# Altium PCB PCB_V3.PcbDoc
Units mm, origin at the board's own origin, x right, y up, seen from the top; angles counter-clockwise.
Board outline 25.27 x 84.33 mm, 2 copper layers (Top Layer, Bottom Layer); 41 components, 24 nets, 113 pads, 17 vias.
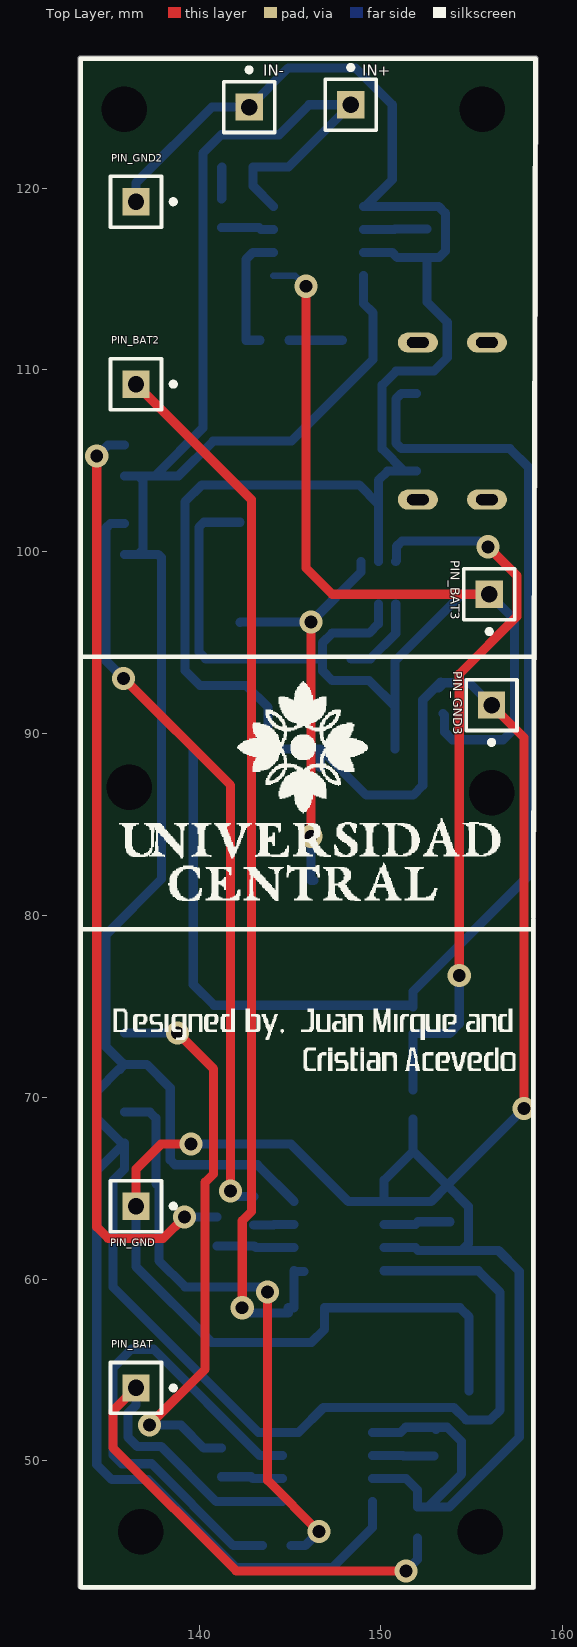
[diagram p0: Top Layer view]
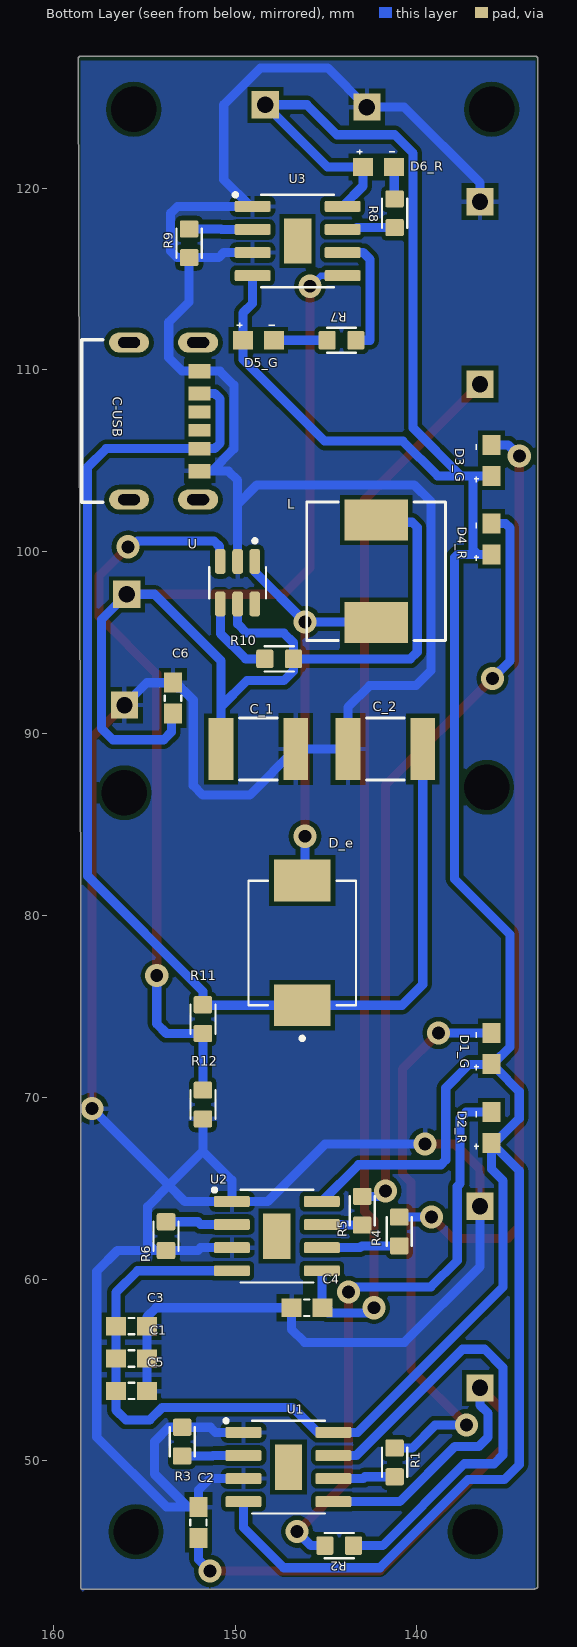
[diagram p1: Bottom Layer view, seen from below]
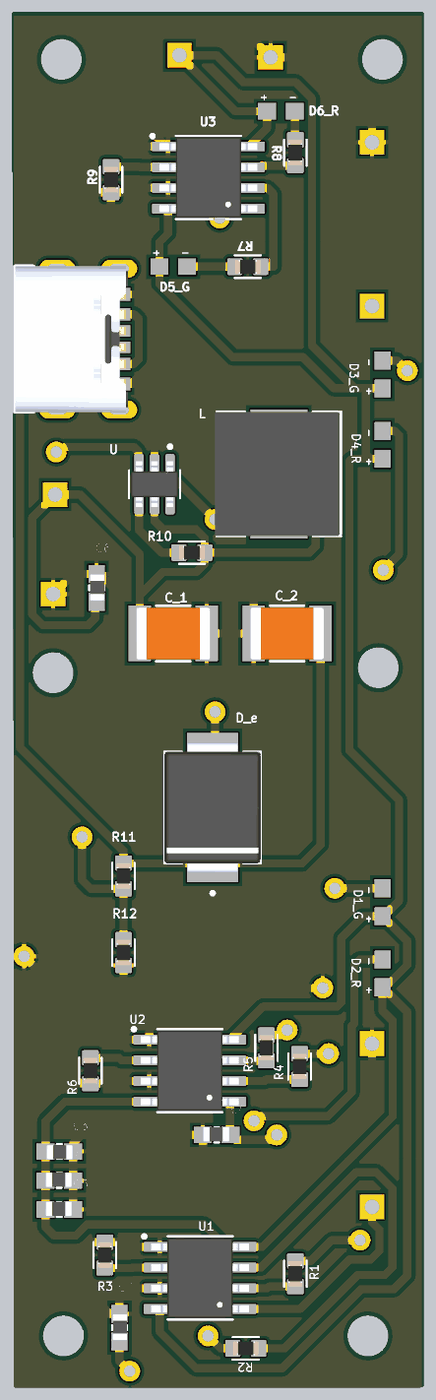
[diagram p2: 3D render of the assembled board from below, using the file's embedded part models]

## Layer stack, top to bottom
Top Solder: solder mask 0.0102, Solder Resist, Dk 3.5
Top Layer: signal copper 0.0356
Dielectric 1: dielectric 0.32, FR-4, Dk 4.8
Bottom Layer: signal copper 0.0356
Bottom Solder: solder mask 0.0102, Solder Resist, Dk 3.5

## Board outline
133.35,43.092 ccw(c133.477,43.092) 133.509,42.968 ccw(c133.604,43.053) 133.604,42.926 158.369,42.926 ccw(c158.369,43.053) 158.496,43.053 158.496,79.756 ccw(c158.369,79.756) 158.479,79.819 ccw(c158.369,79.883) 158.496,79.883 158.623,127.127 ccw(c158.496,127.127) 158.623,127.127 ccw(c158.496,127.127) 158.496,127.254 133.477,127.254 ccw(c133.477,127.127) 133.35,127.127

## Design rules (kind name [scope] priority, off if disabled: settings)
Clearance [All] p1: gap=0.254 ignorepadtopadclearanceinfootprint=FALSE except(0: Arc-Hole Track-Hole SMDPad-Hole THPad-Hole Via-Hole Fill-Hole Poly-Hole Region-Hole Text-Hole)
PolygonConnect [All] p1: connectstyle=Relief reliefconductorwidth=0.254 reliefentries=4 polygonreliefangle="90 Angle" airgapwidth=0.254
RoutingVias [All] p1: holewidth=0.711 width=1.27 viastyle="Through Hole" minholewidth=0.711 minwidth=1.27 maxholewidth=0.711 maxwidth=1.27
SolderMaskExpansion [All] p1: expansion=0.102 istentingtop=FALSE
Width [All] p1: maxlimit=0.5 minlimit=0.254 preferedwidth=0.5
30 further rules are at their usual default settings.

## Components (designator, comment, footprint, x,y, rotation, side; value= is the part's Value field where it differs from the comment)
C1 "100nf" CAPC1608X90 155.702,55.626 r180 bottom
C2 "10uf" CAPC1608X90 152.019,46.609 r270 bottom
C3 "100nf" CAPC1608X90 155.702,57.404 r0 bottom
C4 "10uf" CAPC1608X90 146.05,58.42 r180 bottom
C5 "100nf" CAPC1608X90 155.702,53.848 r180 bottom
C6 "10uf" CAPC1608X90 153.416,91.948 r270 bottom
C-USB "USB4125-GF-A_REVA" GCT_USB4125-GF-A_REVA 152.029,107.19 r270 bottom
C_1 "22uF" CAPC4532X254N 148.717,89.154 r0 bottom
C_2 "47uF" CAPC4532X254N 141.732,89.154 r180 bottom
D1_G "Green" 0603gree 135.89,72.683 r270 bottom
D2_R "Red" 0603red 135.89,68.326 r270 bottom
D3_G "Green" 0603gree 135.89,105.029 r270 bottom
D4_R "Red" 0603red 135.89,100.711 r270 bottom
D5_G "Green" 0603gree 148.717,111.633 r0 bottom
D6_R "Red" 0603red 142.113,121.158 r0 bottom
D_e "SS34" DIOM6859X262N 146.304,78.486 r90 bottom
IN+ "Plug" PIN1 148.336,124.587 r0 top
IN- "Plug" PIN1 142.748,124.46 r0 top
L "220uH" INDM7676X435N 142.24,98.933 r90 bottom
PIN_BAT "Plug" PIN1 136.525,54.009 r270 top
PIN_BAT2 "Plug" PIN1 136.525,109.22 r270 top
PIN_BAT3 "Plug" PIN1 155.956,97.663 r180 top
PIN_GND "Plug" PIN1 136.525,64.009 r270 top
PIN_GND2 "Plug" PIN1 136.525,119.253 r270 top
PIN_GND3 "Plug" PIN1 156.083,91.567 r180 top
R1 "1k" RESC1608X50N 141.224,49.911 r90 bottom
R2 "1k" RESC1608X50N 144.272,45.339 r0 bottom
R3 "1k2" RESC1608X50N 152.908,51.054 r270 bottom
R4 "1k" RESC1608X50N 140.97,62.611 r90 bottom
R5 "1k" RESC1608X50N 143.002,63.754 r90 bottom
R6 "1k2" RESC1608X50N 153.797,62.357 r90 bottom
R7 "1k" RESC1608X50N 144.145,111.633 r0 bottom
R8 "1k" RESC1608X50N 141.224,118.618 r90 bottom
R9 "1k2" RESC1608X50N 152.527,116.967 r90 bottom
R10 "1k" RESC1608X50N 147.574,94.107 r180 bottom
R11 "7.5" RESC1608X50N 151.765,74.295 r270 bottom
R12 "1k" RESC1608X50N 151.765,69.596 r270 bottom
U "MT3608" SOT95P280X145-6N 149.86,98.298 r270 bottom
U1 "TP4056" SOP127P600X175-9N 147.066,49.657 r180 bottom
U2 "TP4056" SOP127P600X175-9N 147.701,62.357 r180 bottom
U3 "TP4056" SOP127P600X175-9N 146.558,117.094 r180 bottom

## Footprints (in the part's own frame and the unit in brackets; to place one, negate y for a bottom-side part, rotate by r counter-clockwise, add the part's x,y. Pads: shape width x height; smd on the part's side, far side on the other; paste and mask are expansions set on the pad)
0603gree [mm]
  rect 1.1x1 smd: 1(-0.85,0) 2(0.85,0)
  silkscreen extent -0.89,-0.97 1.19,-0.71, body extent -0.8,-0.4 0.8,0.4, height 0.4
0603red [mm]
  rect 1.1x1 smd: 1(-0.85,0) 2(0.85,0)
  silkscreen extent -0.89,-0.97 1.19,-0.71, body extent -0.8,-0.4 0.8,0.4, height 0.4
CAPC1608X90 [mm]
  rect 1.1x1 smd: 1(-0.85,0) 2(0.85,0)
  silkscreen extent -0.15,-0.45 0.15,0.45, body extent -0.83,-0.41 0.77,0.49, height 0.78
CAPC4532X254N [mil]
  rect 54x134 smd: 1(-81,0) 2(81,0)
  silkscreen extent -41,-67 41,67, body extent -89,-63 89,63, height 100
DIOM6859X262N [mm]
  rect 2.29x3.12 smd: A(3.43,0) C(-3.43,0)
  silkscreen extent -5.35,-2.95 3.43,2.95, body extent -3.97,-2.95 3.97,2.95, height 2.62
GCT_USB4125-GF-A_REVA [mm]
  rect 0.7x1.2 smd: A5(-0.5,0.08) B5(0.5,0.08)
  rect 0.76x1.2 smd: A9(1.52,0.08) B9(-1.52,0.08)
  rect 0.8x1.2 smd: A12(2.75,0.08) B12(-2.75,0.08)
  oval 1.1x2.2 hole 0.6 slot 1.2 at 90 deg: S1(-4.32,0) S2(4.32,0) S3(-4.32,-3.8) S4(4.32,-3.8)
  silkscreen extent -4.47,-6.4 4.47,-5.25, body extent -4.47,-6.37 4.47,0.53, height 3.26
INDM7676X435N [mil]
  rect 89x138 smd: 1(-111,0) 2(111,0)
  silkscreen extent -150,-150 150,150, body extent -150,-145 150,154, height 171
PIN1 [mm] "Connector; Plug"
  rect 1.5x1.5 hole 0.9: 1(0,0)
  silkscreen extent -1.4,-1.4 1.4,2.17
RESC1608X50N [mm]
  rrect20% 0.94x1.02 smd: 1(-0.79,0) 2(0.79,0)
  silkscreen extent -0.8,-0.69 0.8,0.69, body extent -0.77,-0.43 0.77,0.43, height 0.45
SOP127P600X175-9N [mm]
  rrect25% 1.97x0.6 smd: 1(-2.475,1.905) 2(-2.475,0.635) 3(-2.475,-0.635) 4(-2.475,-1.905) 5(2.475,-1.905) 6(2.475,-0.635) 7(2.475,0.635) 8(2.475,1.905)
  rect 1.5x2.5 smd paste-3: 9(0,0)
  silkscreen extent -3.53,-2.55 2,2.64, body extent -3,-2.45 3,2.45, height 1.75
SOT95P280X145-6N [mm]
  rrect50% 1.37x0.59 smd: 1(-1.17,0.95) 2(-1.17,0) 3(-1.17,-0.95) 4(1.17,-0.95) 5(1.17,0) 6(1.17,0.95)
  silkscreen extent -2.4,-1.56 0.85,1.56, body extent -1.4,-1.45 1.4,1.45, height 1.45

## Part data
C1 C2 C3 C4 C5 C6: library part CC0603KRX7R9BB104, "0.1ÂµF Â±10% 50V Ceramic Capacitor X7R 0603 _1608 Metric_", Package="0603 Yageo", Digi-Key_Part_Number=311-1344-1-ND, Digi-Key_Purchase_URL=https://www.digikey.com/product-detail/en/yageo/CC0603KRX7R9BB104/311-1344-1-ND/2103128?utm_source=snapeda&utm_medium=aggregator&utm_campaign=symbol, MF=Yageo, MP=CC0603KRX7R9BB104, SnapEDA_Link=https://www.snapeda.com/parts/CC0603KRX7R9BB104/Yageo/view-part/78680/?ref=snap
C-USB: "USB 2.0 Type C Receptacle, Horizontal, SMT, For Power charging", Package=None, Availability=Unavailable, Check_prices=https://www.snapeda.com/parts/USB4125-GF-A/Global%20Connector%20Technology/view-part/5160675/?ref=eda, MF="Global Connector Technology", MP=USB4125-GF-A, Price=None, SnapEDA_Link=https://www.snapeda.com/parts/USB4125-GF-A/Global%20Connector%20Technology/view-part/5160675/?ref=snap
C_1 C_2: library part 1812PC334KAT1A, "0.33ÂµF Â±10% 250V Ceramic Capacitor X7R 1812 (4532 Metric)", Package="1812 AVX", Availability=Warning, Check_prices=https://www.snapeda.com/parts/1812PC334KAT1A/AVX/view-part/607553/?ref=eda, MF=AVX, MP=1812PC334KAT1A, Price=None, Purchase-URL=https://pricing.snapeda.com/search/part/1812PC334KAT1A/?ref=eda, SnapEDA_Link=https://www.snapeda.com/parts/1812PC334KAT1A/AVX/view-part/607553/?ref=snap
D1_G D2_R D3_G D4_R D5_G D6_R: library part LTST-C191KGKT, "Green 571nm LED Indication - Discrete 2V 0603 _1608 Metric_", Package="0603 Lite-On", Availability=Unavailable, MF="Lite-On Inc.", MP=LTST-C191KGKT, Price=None, SnapEDA_Link=https://www.snapeda.com/parts/LTST-C191KGKT/Lite-On%20Inc./view-part/48565/?ref=snap
D_e: "Diode; Repetitive Reverse Voltage Max, Vrrm: 40V; Forward Current, If(AV): 3A; Forward Surge Current Max, Ifsm: 100A;...", Package="SMC-2 ON Semiconductor", Availability=Good, Check_prices=https://www.snapeda.com/parts/SS34/ON%20Semiconductor/view-part/547583/?ref=eda, MF="ON Semiconductor", MP=SS34, Price=None, Purchase-URL=https://pricing.snapeda.com/search/part/SS34/?ref=eda, SnapEDA_Link=https://www.snapeda.com/parts/SS34/ON%20Semiconductor/view-part/547583/?ref=snap
L: library part DR74-2R2-R, "2.2ÂµH Shielded Wirewound Inductor 4.76A 12.6mOhm Nonstandard", Package="Nonstandard Eaton", Availability=Unavailable, MF=Eaton, MP=DR74-2R2-R, Price=None, SnapEDA_Link=https://www.snapeda.com/parts/DR74-2R2-R/Eaton/view-part/2774133/?ref=snap
R1 R2 R3 R4 R5 R6 R7 R8 R9 R10 R11 R12: library part RP73D1J13RBTDG, "Res, Thin Film, 13r, 0.1%, 0.1w, 0603", Package="0603 TE Connectivity / AMP", Availability=Unavailable, MF="TE Connectivity", MP=RP73D1J13RBTDG, Price=None, SnapEDA_Link=https://www.snapeda.com/parts/RP73D1J13RBTDG/TE%20Connectivity/view-part/970906/?ref=snap, TE_purchase_URL=https://www.te.com/usa-en/product-RP73D1J13RBTDG.html?te_bu=Cor&te_type=disp&te_campaign=seda_glo_cor-seda-global-disp-prtnr-fy19-seda-model-bom-cta_sma-317_1&elqCampaignId=32493
U: "High Efficiency 1.2MHz2A Step Up Converter", Package="Package Analog Devices", Availability=Unavailable, MF="Aerosemi Technology Co., Ltd", MP=MT3608, Price=None, SnapEDA_Link=https://www.snapeda.com/parts/MT3608/Aerosemi%20Technology%20Co.%2C%20Ltd/view-part/3218014/?ref=snap
U1 U2 U3: "Complete single cell Li-Ion battery with a constant current / constant voltage linear charger", Package=Package, Availability="No availability data", Check_prices=https://www.snapeda.com/parts/TP4056%20/NanJing%20Top%20Power%20ASIC%20Corp./view-part/2888426/?ref=eda, MF="NanJing Top Power ASIC Corp.", MP=TP4056, Price=None, SnapEDA_Link=https://www.snapeda.com/parts/TP4056%20/NanJing%20Top%20Power%20ASIC%20Corp./view-part/2888426/?ref=snap
IN+ IN- PIN_BAT PIN_BAT2 PIN_BAT3 PIN_GND PIN_GND2 PIN_GND3: LatestRevisionDate=17-Jul-2002, LatestRevisionNote="Re-released for DXP Platform.", Publisher="Altium Limited"

## Free pads (board coordinates)
  round 0 hole 2.5 unplated paste-1000 mask+0: 13(135.89,124.333) 13(136.144,87.052) 13(136.779,46.101) 13(155.448,46.101) 13(155.575,124.333) 13(156.083,86.741)

## Via types
v1: diameter 1.27, hole 0.711, Top Layer to Bottom Layer, 17 vias

## Nets (pads, with @x,y where several pads share a name; then routed paths per layer and width w, separated by ;. In a path a pad name is that pad's centre, name@x,y a point inside that pad or via, vN(x,y) a via of type N, cw(c..) or ccw(c..) an arc to the next point about the centre after c; other vN are vias at no path point)
GND: C1.2 C2.1 C3.1 C4.1 C5.2 C6.1 C-USB.A12 C-USB.B12 C_1.1 C_2.1 IN-.1 PIN_GND2.1 PIN_GND3.1 PIN_GND.1 R3.1 R6.1 R9.1 R12.2 U1.1 U1.3 U2.1 U2.3 U3.1 U3.3 U.2 | length 236.7
  Top Layer w0.5: PIN_GND.1 136.525,66.04 137.91,67.425 v1(139.548,67.425) ; PIN_GND3.1 157.861,89.789 v1(157.861,69.367)
  Bottom Layer w0.5: PIN_GND.1 136.525,60.677 140.687,56.515 146.177,56.515 146.9,57.238 C4.1 154.344,58.42 154.852,57.912 C3.1 C1.2 C5.2 ; PIN_GND2.1 136.525,120.289 140.696,124.46 IN-.1 144.907,126.619 148.59,126.619 150.622,124.587 150.622,120.472 U3.1@149.149,118.999 ; v1(139.548,67.425) 145.046,67.425 148.209,64.262 U2.1 ; C_1.1@146.66,88.138 C_1.1 ; U3.3 150.622,116.459 150.904,116.177 R9.1 ; U3.1 U3.1@149.149,118.999 ; U1.3 151.384,49.022 152.019,48.387 C2.1 152.615,47.459 ; U1.1 151.079,51.562 151.361,51.844 R3.1 ; U.2 149.86,102.616 ; U2.3 151.892,61.722 152.047,61.567 R6.1 154.432,61.567 ; R12.2 151.765,67.031 ; C-USB.A12 151.287,104.44 ; R3.1@153.034,51.718 R3.1 ; C6.1@153.166,92.498 153.416,92.748 C6.1 154.852,92.798 PIN_GND3.1 ; C6.1@153.289,92.837 152.298,91.846 152.298,87.147 151.765,86.614 149.2,86.614 C_1.1 ; v1(157.861,69.367) 153.645,65.151 ; C_1.1 C_2.1 143.789,91.44 142.596,92.634 140.056,92.634 139.217,93.472 139.217,102.743 140.157,103.683 148.793,103.683 149.86,102.616 ; U3.1@149.149,118.999 153.162,118.999 153.543,118.618 153.543,116.535 153.185,116.177 R9.1 ; 149.86,102.616 149.86,103.932 150.368,104.44 151.287,104.44 ; U2.1 152.756,64.262 153.645,65.151 ; U2.1 150.176,65.442 151.765,67.031 ; 151.287,104.44 150.063,105.664 150.063,109.169 150.834,109.94 C-USB.B12 152.908,109.94 153.645,110.677 153.645,112.624 152.527,113.741 R9.1 ; 151.765,67.031 153.645,65.151 ; 152.615,47.459 154.432,49.276 154.432,51.054 153.642,51.844 R3.1 ; 152.615,47.459 153.764,47.459 157.607,51.302 157.607,60.424 156.464,61.567 154.432,61.567 ; 153.645,65.151 154.813,63.983 154.813,61.948 154.432,61.567
NetC2_2: C2.2 PIN_BAT.1 U1.5 | length 37.7
  Top Layer w0.5: PIN_BAT.1 135.255,52.739 135.255,50.728 142.041,43.942 v1(151.384,43.942)
  Bottom Layer w0.5: PIN_BAT.1 136.525,53.065 136.076,52.615 136.076,51.308 136.597,50.787 137.91,50.787 140.945,47.752 U1.5 ; v1(151.384,43.942) 152.019,44.577 C2.2
NetC4_2: C4.2 PIN_BAT2.1 U2.5 | length 59.5
  Top Layer w0.5: PIN_BAT2.1 142.871,102.874 142.871,63.707 142.367,63.203 v1(142.367,58.42)
  Bottom Layer w0.5: v1(142.367,58.42) 142.663,58.124 144.9,58.124 144.9,58.42 C4.2 ; C4.2@145.226,58.446 U2.5 145.226,60.402 U2.5@145.766,60.402
NetC6_2: C6.2 C_1.2 L.2 PIN_BAT3.1 R10.2 U3.5 U.5 | length 80.2
  Top Layer w0.5: v1(145.872,114.605) 145.872,99.111 147.32,97.663 PIN_BAT3.1
  Bottom Layer w0.35: U3.5 145.288,115.189 v1(145.872,114.605)
  Bottom Layer w0.5: L.2@142.24,101.625 140.259,101.625 139.979,101.346 139.979,94.488 140.36,94.107 R10.2 ; U.5 149.86,96.037 149.352,95.529 147.317,95.529 146.784,94.996 R10.2 ; C_1.2 150.774,91.491 ; C6.2 153.495,91.019 153.495,90.091 153.924,89.662 156.718,89.662 157.353,90.297 157.353,96.266 PIN_BAT3.1 154.432,97.663 150.774,94.005 150.774,91.491 ; R10.2 146.784,93.449 147.32,92.913 149.352,92.913 150.774,91.491
NetC-USB_A9: C-USB.A9 C-USB.B9 C_2.2 D_e.C R11.1 | length 69.4
  Bottom Layer w0.5: C_2.2 139.675,76.2 140.819,75.056 D_e.C R11.1@151.765,75.056 ; R11.1@151.765,74.958 R11.1@151.765,75.056 ; C-USB.B9 151.13,108.71 150.825,108.405 150.825,105.975 151.13,105.67 C-USB.A9 157.093,105.67 158.115,104.648 158.115,82.169 151.765,75.819 R11.1 R11.1@151.765,75.056
NetD1_G_1: D1_G.1 R1.2 | length 31.3
  Top Layer w0.5: v1(137.262,51.968) 140.331,55.038 140.331,65.321 140.792,65.782 140.792,71.552 v1(138.811,73.533)
  Bottom Layer w0.5: D1_G.1 v1(138.811,73.533) ; v1(137.262,51.968) 138.991,51.968 140.259,50.701 R1.2
NetD2_R_1: D2_R.1 R2.2 | length 32.7
  Top Layer w0.5: v1(143.764,59.284) 143.764,48.92 v1(146.583,46.101)
  Bottom Layer w0.5: D2_R.1 137.287,69.176 137.617,68.846 137.617,65.253 137.779,65.091 137.779,61.011 139.227,59.563 143.485,59.563 v1(143.764,59.284) ; R2.2 145.821,45.339 v1(146.583,46.101)
NetD3_G_1: D3_G.1 R4.2 | length 51.5
  Top Layer w0.5: v1(134.366,105.258) 134.366,62.865 135.001,62.23 138.021,62.23 v1(139.192,63.401)
  Bottom Layer w0.5: v1(134.366,105.258) 134.987,105.879 D3_G.1 ; v1(139.192,63.401) R4.2
NetD4_R_1: D4_R.1 R5.2 | length 41.8
  Top Layer w0.5: v1(135.839,93.04) 141.732,87.147 v1(141.732,64.846)
  Bottom Layer w0.5: v1(135.839,93.04) 134.874,94.005 134.874,101.307 135.128,101.561 D4_R.1 ; v1(141.732,64.846) 142.034,64.544 R5.2
NetD5_G_1: D5_G.1 R7.2 | length 2.9
  Bottom Layer w0.5: R7.2 D5_G.1
NetD6_R_1: D6_R.1 R8.2 | length 1.8
  Bottom Layer w0.5: R8.2 141.244,119.427 141.244,121.138 D6_R.1
NetD_e_A: D_e.A L.1 U.1 | length 22.8
  Top Layer w0.5: v1(146.152,84.353) v1(146.152,96.139)
  Bottom Layer w0.5: L.1 142.265,96.139 v1(146.152,96.139) 148.91,98.897 U.1 ; v1(146.152,84.353) 146.152,81.916 D_e.A
NetR1_1: R1.1 U1.6 | length 3.4
  Bottom Layer w0.5: R1.1 142.85,49.121 142.949,49.022 U1.6
NetR2_1: R2.1 U1.7 | length 27.2
  Bottom Layer w0.5: R2.1 141.884,45.339 137.387,49.836 135.752,49.836 135.271,50.318 135.271,55.134 136.271,56.134 137.49,56.134 143.332,50.292 U1.7
NetR3_2: R3.2 U1.2 | length 3.4
  Bottom Layer w0.5: U1.2 151.206,50.292 151.234,50.264 R3.2
NetR4_1: R4.1 U2.6 | length 4.3
  Bottom Layer w0.5: R4.1 143.027,61.821 143.126,61.722 U2.6
NetR5_1: R5.1 U2.7 | length 2.2
  Bottom Layer w0.5: R5.1 144.094,62.964 144.122,62.992 U2.7
NetR6_2: R6.2 U2.2 | length 3.7
  Bottom Layer w0.5: U2.2 151.892,62.992 152.047,63.147 R6.2
NetR7_1: R7.1 U3.6 | length 6.9
  Bottom Layer w0.5: R7.1 142.57,111.633 142.57,116.078 142.951,116.459 U3.6
NetR8_1: R8.1 U3.7 | length 2.9
  Bottom Layer w0.5: R8.1 143.299,117.828 143.398,117.729 U3.7
NetR9_2: R9.2 U3.2 | length 3.5
  Bottom Layer w0.5: U3.2 150.749,117.729 150.777,117.757 R9.2
NetR10_1: R10.1 U.4 | length 4.6
  Bottom Layer w0.5: R10.1 149.413,94.107 150.81,95.504 U.4
NetR11_2: R11.2 R12.1 U.3 | length 40.1
  Top Layer w0.5: v1(154.305,76.683) 154.305,93.269 157.48,96.444 157.48,98.679 v1(155.885,100.274)
  Bottom Layer w0.5: U.3 150.855,99.513 150.855,100.291 151.148,100.584 155.367,100.584 155.676,100.274 v1(155.885,100.274) ; R12.1 R11.2@151.765,73.378 ; R11.2 153.769,73.505 154.305,74.041 v1(154.305,76.683)
VCC: C1.1 C3.2 C5.1 D1_G.2 D2_R.2 D3_G.2 D4_R.2 D5_G.2 D6_R.2 IN+.1 U1.4 U1.8 U2.4 U2.8 U3.4 U3.8 | length 200.5
  Bottom Layer w0.5: D1_G.2@135.615,71.558 134.366,70.309 134.366,68.834 D2_R.2@135.763,67.437 ; D1_G.2@135.64,71.533 135.89,71.783 D1_G.2@135.89,71.808 ; D1_G.2@135.763,71.882 134.874,72.771 134.874,78.943 137.922,81.991 137.922,99.683 137.744,99.861 136.652,99.861 ; D1_G.2 D1_G.2@135.89,71.808 ; D4_R.2 136.652,99.861 ; D3_G.2 136.652,104.179 ; U3.8 142.963,120.119 D6_R.2 144.907,121.158 IN+.1 146.05,124.587 144.399,122.936 141.224,122.936 140.208,121.92 140.208,106.807 137.58,104.179 ; U2.8 143.202,66.286 138.671,66.286 138.409,66.548 138.409,70.506 137.107,71.808 D1_G.2@135.89,71.808 ; U3.4 149.033,113.666 149.567,113.132 D5_G.2 149.567,110.578 145.073,106.084 140.767,106.084 138.862,104.179 137.58,104.179 ; U1.4 149.541,46.341 147.32,44.12 142.037,44.12 137.192,48.965 135.195,48.965 134.366,49.793 134.366,65.952 D2_R.2 135.89,66.04 135.255,65.405 135.255,59.563 143.256,51.562 U1.8 145.466,51.562 146.837,52.934 154.004,52.934 154.689,52.248 156.007,52.248 156.552,52.793 C5.1 C1.1 C3.2 156.552,59.258 155.358,60.452 U2.4 ; 136.652,99.861 136.906,100.115 136.906,103.925 136.652,104.179 ; 136.652,104.179 137.58,104.179
pads on no net: C-USB.A5 C-USB.B5 C-USB.S1 C-USB.S2 C-USB.S3 C-USB.S4 U1.9 U2.9 U3.9 U.6

## Polygon pours and split planes (outlines as drawn)
GND on Bottom Layer "GND_L02_P000" (solid, pour order 0): 133.477,127 158.496,127 158.496,42.926 158.369,42.799 158.242,42.926 133.477,42.926

## Silkscreen, mask and mechanical layers (free items; w line width, h text height)
Top Overlay:
  drawing of 73 lines, arcs and shapes, not listed